# EAGLE board msp430g2553in20-test-board (EAGLE 6.4)
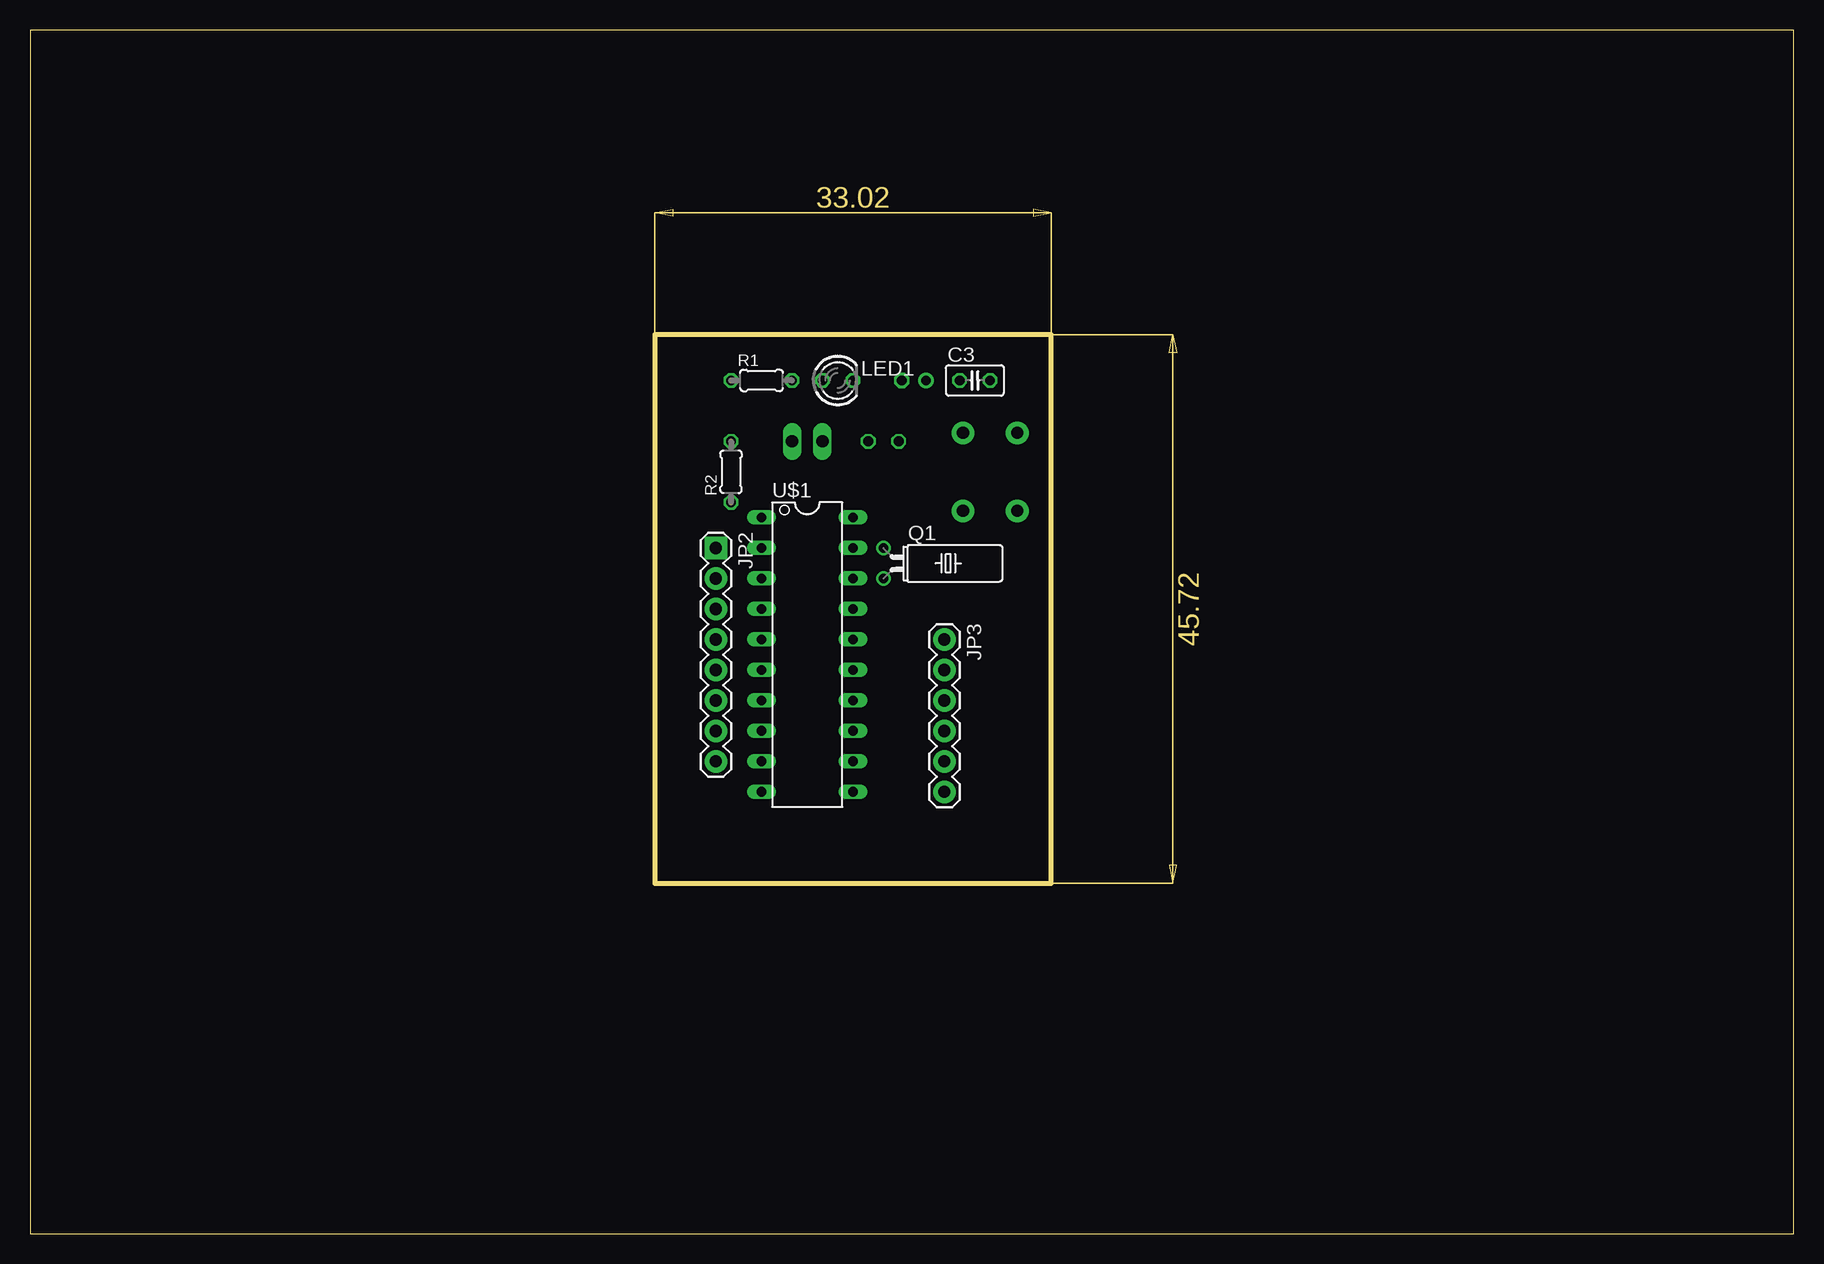
[diagram p0: board, top side]
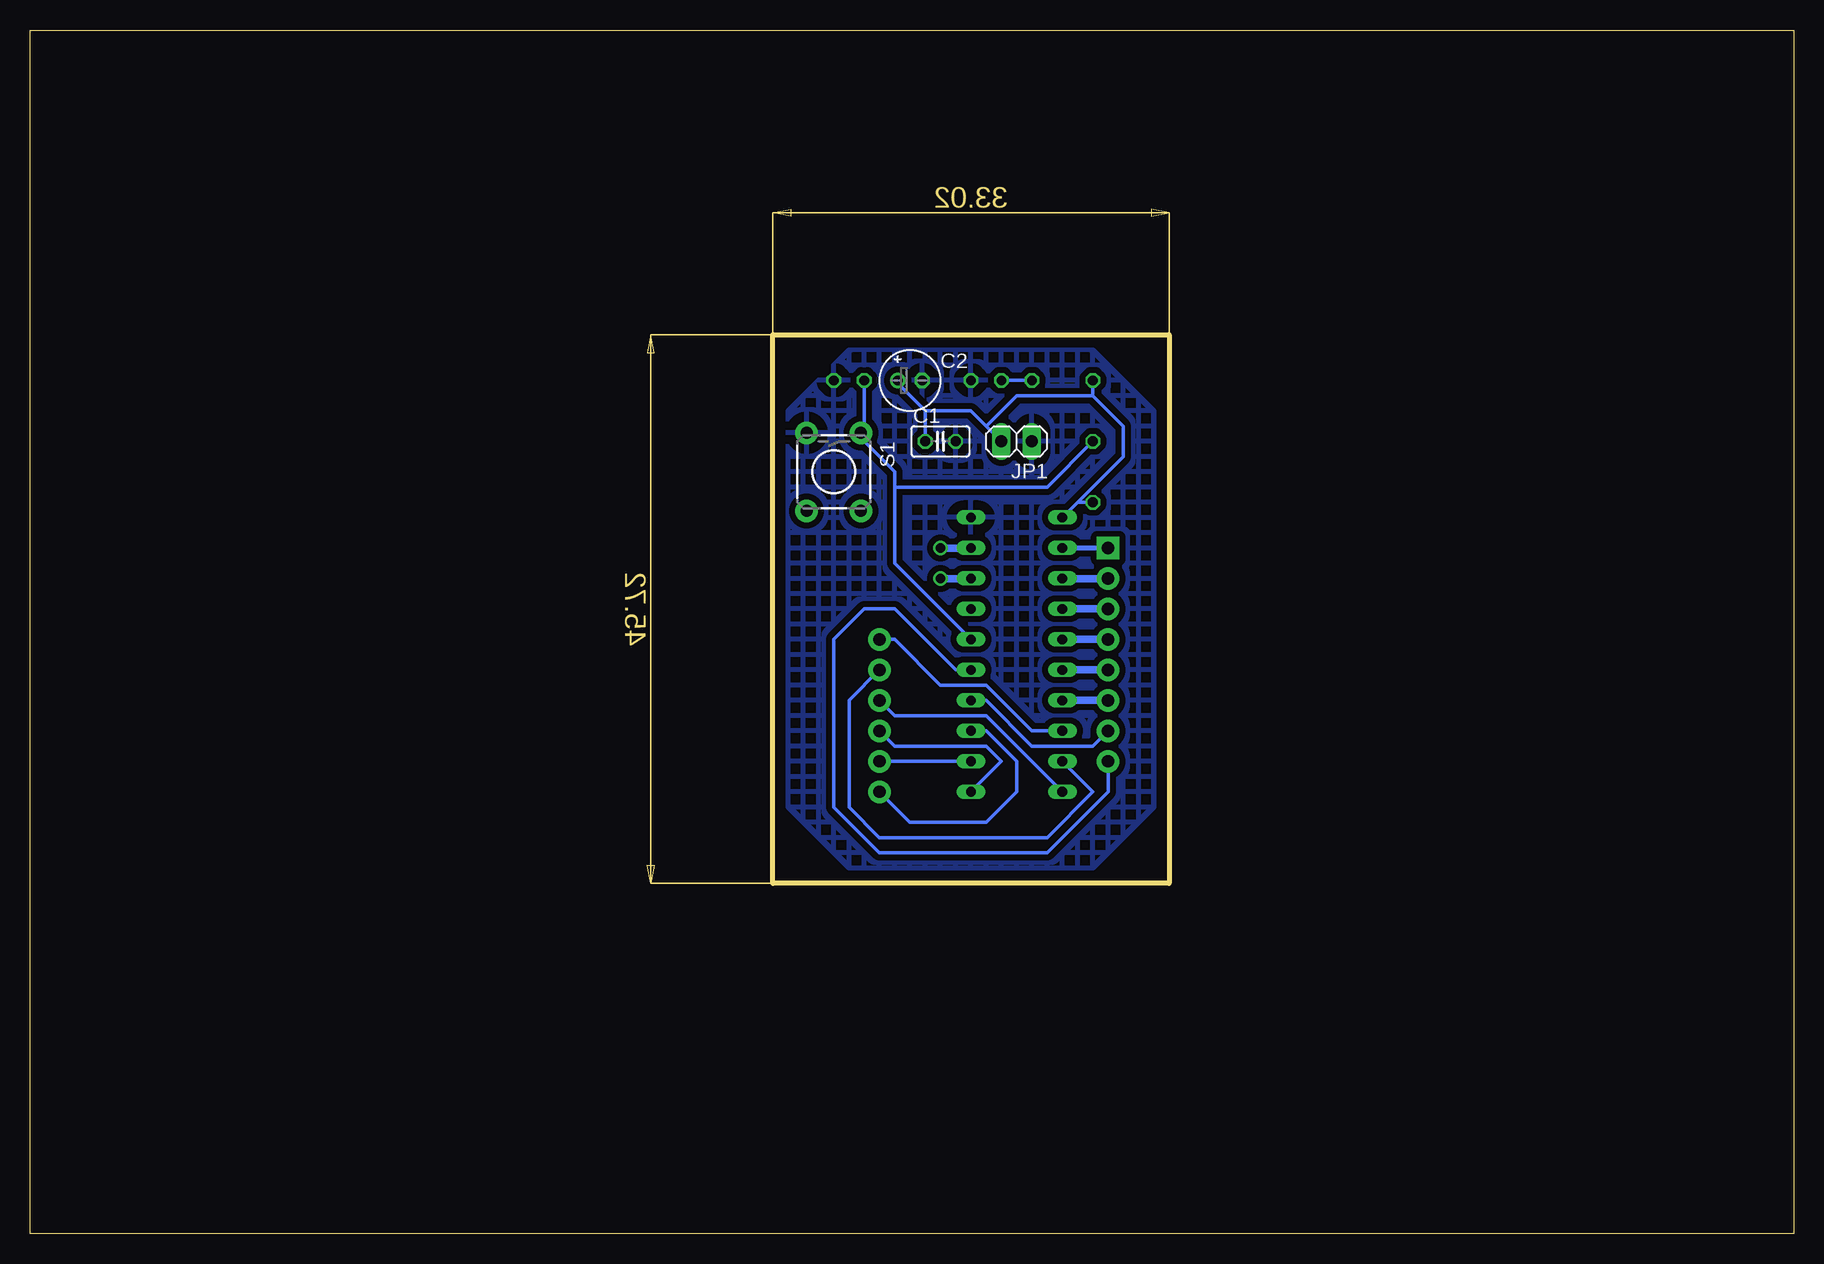
[diagram p1: board, bottom side, seen from below]

Size 146.99 x 100.32 mm. Coordinates in mm from the lower left corner, seen from the top.
Outline: 0,0 146.99,0 146.99,100.32 0,100.32 0,0
Outline: 52.07,74.93 52.07,29.21 85.09,29.21 85.09,74.93 52.07,74.93
Copper layers (1*16): Top 0.035mm / dielectric 1.5mm / Bottom 0.035mm
Design rules "default-1 *": minimum track width 0.3mm, minimum drill 0.8mm, track to track 0.5mm, track to pad 0.5mm, pad to pad 0.5mm, via to via 12mil, smd to smd 8mil, copper to edge 0.8mm, drill to drill 0.8mm, minimum pad ring 0.2mm, minimum via ring 12mil, stop-mask expansion 4mil, vias tented up to drill 0mil, thermal gap 0.8mm

## Footprints (pad centres in the part's own frame; a part is rotated, then mirrored left to right if it is on the bottom)
C025-025X050 = drill 0.813 octagon: 1 -1.27,0; 2 1.27,0
E2-5 = drill 0.813 pad 1.27: + -1.016,0 | drill 0.813 pad 1.27 octagon: - 1.016,0
1X02 = drill 1.016 long: 1 -1.27,0; 2 1.27,0
1X08 = drill 1.016 pad 1.88 square: 1 0,0 | drill 1.016 pad 1.88: 2 2.54,0; 3 5.08,0; 4 7.62,0; 5 10.16,0; 6 12.7,0; 7 15.24,0; 8 17.78,0
1X06 = drill 1.016 pad 1.88: 1 0,0; 2 2.54,0; 3 5.08,0; 4 7.62,0; 5 10.16,0; 6 12.7,0
LED3MM = drill 0.813 octagon: A -1.27,0; K 1.27,0
TC38H = drill 0.813: 1 -1.27,0; 2 1.27,0
0204/5 = drill 0.813 octagon: 1 -2.54,0; 2 2.54,0
TACTILE-PTH = drill 1.016 pad 1.88: 1 -3.251,2.261; 2 3.251,2.261; 3 -3.251,-2.261; 4 3.251,-2.261
N20 = drill 0.813 long: 1 -11.435,-3.81; 2 -8.895,-3.81; 3 -6.355,-3.81; 4 -3.815,-3.81; 5 -1.275,-3.81; 6 1.265,-3.81; 7 3.805,-3.81; 8 6.345,-3.81; 9 8.885,-3.81; 10 11.425,-3.81; 11 11.425,3.81; 12 8.885,3.81; 13 6.345,3.81; 14 3.805,3.81; 15 1.265,3.81; 16 -1.275,3.81; 17 -3.815,3.81; 18 -6.355,3.81; 19 -8.895,3.81; 20 -11.435,3.81

## Placement (x,y rotation side)
C1  100nF  [C025-025X050]  71.12,66.04 0 bottom
C2  10uF/25V  [E2-5]  73.66,71.12 0 bottom
C3  1nF  [C025-025X050]  78.74,71.12 0 top
JP1  PWR  [1X02]  64.77,66.04 180 bottom
JP2  PORT1  [1X08]  57.15,57.15 270 top
JP3  PORT2  [1X06]  76.2,49.53 270 top
LED1  GREEN  [LED3MM]  67.31,71.12 0 top
Q1  32768  [TC38H]  71.12,55.88 270 top
R1  270  [0204/5]  60.96,71.12 0 top
R2  47K  [0204/5]  58.42,63.5 90 top
S1  SWITCH-MOMENTARY-2PTH  [TACTILE-PTH]  80.01,63.5 270 bottom
U$1  G2XX3---N20  [N20]  64.77,48.26 270 top

## Library data of the parts
C1-C3 R1 R2 = rcl
JP1 = pinhead
JP2 JP3 = SparkFun-Connectors
LED1 = led
Q1 = crystal; OC_FARNELL: unknown; OC_NEWARK: unknown
S1 = SparkFun-Electromechanical
U$1 = TI_MSP430_v16

## Nets
GND: C1.2 C2.- C3.2 JP1.1 LED1.K S1.3 U$1.20
N$1: JP2.1 U$1.2
N$2: Q1.1 U$1.19
N$3: Q1.2 U$1.18
N$4: LED1.A R1.2
N$6: JP2.2 U$1.3
N$7: JP2.3 U$1.4
N$8: JP2.4 U$1.5
N$9: JP2.5 U$1.6
N$10: JP2.6 U$1.7
N$11: JP2.7 U$1.14
N$12: JP2.8 U$1.15
N$13: JP3.1 U$1.8
N$14: JP3.4 U$1.11
N$15: JP3.5 U$1.12
N$16: JP3.6 U$1.13
N$17: JP3.2 U$1.9
N$18: JP3.3 U$1.10
RST: C3.1 R2.2 S1.1 U$1.16
VCC: C1.1 C2.+ JP1.2 R1.1 R2.1 U$1.1

## Tracks (layer width: path | path; a pad name or v marks a point on that pad's centre or on a via)
GND
  pour Bottom (hatched): 53.34,35.56 58.42,30.48 78.74,30.48 83.82,35.56 83.82,68.58 78.74,73.66 58.42,73.66 53.34,68.58
N$1
  Bottom 0.3: U$1.2
  Bottom 0.406: JP2.1 U$1.2
N$2
  Bottom 0.3: U$1.19
  Bottom 0.61: Q1.1 U$1.19
N$3
  Bottom 0.3: U$1.18
  Bottom 0.61: Q1.2 U$1.18
N$4
  Bottom 0.3: LED1.A R1.2
N$6
  Bottom 0.3: U$1.3
  Bottom 0.61: JP2.2 U$1.3
N$7
  Bottom 0.3: U$1.4
  Bottom 0.61: JP2.3 U$1.4
N$8
  Bottom 0.3: U$1.5
  Bottom 0.61: JP2.4 U$1.5
N$9
  Bottom 0.3: U$1.6
  Bottom 0.61: JP2.5 U$1.6
N$10
  Bottom 0.3: U$1.7
  Bottom 0.61: JP2.6 U$1.7
N$11
  Bottom 0.3: JP2.7 58.42,40.64 63.5,40.64 67.31,44.45 U$1.14
N$12
  Bottom 0.3: JP2.8 57.15,36.83 62.23,31.75 76.2,31.75 80.01,35.56 80.01,49.53 77.47,52.07 74.93,52.07 69.85,46.99 U$1.15
N$13
  Bottom 0.3: JP3.1 74.93,49.53 71.12,45.72 67.31,45.72 63.5,41.91 U$1.8
N$14
  Bottom 0.3: JP3.4 74.93,40.64 67.31,40.64 66.04,39.37 U$1.11
N$15
  Bottom 0.3: JP3.5 U$1.12
N$16
  Bottom 0.3: JP3.6 73.66,34.29 67.31,34.29 64.77,36.83 64.77,39.37 67.31,41.91 U$1.13
N$17
  Bottom 0.3: JP3.2 78.74,44.45 78.74,35.56 76.2,33.02 62.23,33.02 58.42,36.83 U$1.9
N$18
  Bottom 0.3: JP3.3 74.93,43.18 67.31,43.18 U$1.10
RST
  Bottom 0.3: 74.93,62.23 74.93,63.5 77.47,66.04 S1.1 77.47,67.31 C3.1 | 74.93,62.23 74.93,55.88 U$1.16 | R2.2 62.23,62.23 74.93,62.23
VCC
  Bottom 0.3: 72.39,68.58 C1.1 | 72.39,68.58 74.93,71.12 C2.+ | 67.31,67.31 68.58,68.58 72.39,68.58 | 67.31,67.31 JP1.2 | 59.69,60.96 R2.1 | 59.69,60.96 U$1.1 | 58.42,69.85 R1.1 | 58.42,69.85 55.88,67.31 55.88,64.77 59.69,60.96 | 67.31,67.31 64.77,69.85 58.42,69.85